# EAGLE board Copy of Motors Control by L293 Driver (done) (1) (EAGLE 9.7.0)

Size 306.62 x 287.84 mm. Coordinates in mm from the lower left corner, seen from the top.
Outline: 0,0 306.62,0 306.62,287.84 0,287.84 0,0
Copper layers (1*16): Top 0.035mm / dielectric 1.5mm / Bottom 0.035mm
Design rules "default": minimum track width 6mil, minimum drill 0.35mm, track to track 6mil, track to pad 6mil, pad to pad 6mil, via to via 6mil, smd to smd 6mil, copper to edge 40mil, drill to drill 6mil, minimum pad ring 10mil, minimum via ring 8mil, stop-mask expansion 4mil, vias tented up to drill 0mil, thermal gap 10mil

## Footprints (pad centres in the part's own frame; a part is rotated, then mirrored left to right if it is on the bottom)
LEDRD254W60D565H860B_G = drill 0.981 pad 1.581: 1 -1.27,0; 2 1.27,0
LEDRD254W60D565H860B_W = drill 0.981 pad 1.581: 1 -1.27,0; 2 1.27,0
MOTOR = drill 1.118 pad 3.15 octagon: + 2.54,0; - -2.54,0
MIC127-140-A01 = smd 0.8 x 2.502: P$1 24.765,2.54; P$2 23.495,2.54; P$3 22.225,2.54; P$4 20.955,2.54; P$5 19.685,2.54; P$6 18.415,2.54; P$7 17.145,2.54; P$8 15.875,2.54; P$9 14.605,2.54; P$10 13.335,2.54; P$11 12.065,2.54; P$12 10.795,2.54; P$13 9.525,2.54; P$14 8.255,2.54; P$15 6.985,2.54; P$16 5.715,2.54; P$17 4.445,2.54; P$18 3.175,2.54; P$19 1.905,2.54; P$20 0.635,2.54; P$21 -0.635,2.54; P$22 -1.905,2.54; P$23 -3.175,2.54; P$24 -4.445,2.54; P$25 -5.715,2.54; P$26 -6.985,2.54; P$27 -8.255,2.54; P$28 -9.525,2.54; P$29 -10.795,2.54; P$30 -12.065,2.54; P$31 -13.335,2.54; P$32 -14.605,2.54; P$33 -15.875,2.54; P$34 -17.145,2.54; P$35 -18.415,2.54; P$36 -19.685,2.54; P$37 -20.955,2.54; P$38 -22.225,2.54; P$39 -23.495,2.54; P$40 -24.765,2.54 | drill 1.1 pad 2.3: P$41 26.899,-1.168; P$42 -26.899,-1.168
PIEZO = drill 1 pad 1.6: 1 -3.5,0; 2 3.5,0
28015 = drill 1.016 long: 1 -2.54,0; 2 0,0; 3 2.54,0
28027 = drill 1.016 long: 1 -2.54,0; 2 0,0; 3 2.54,0
RESAD1016W63L850D250B = drill 0.83 pad 1.43: 1 -5.08,0; 2 5.08,0
SWITCH-MOMENTARY-PTH-6.5MM = drill 1.016 pad 1.88: 1 -3.251,2.261; 2 3.251,2.261; 3 -3.251,-2.261; 4 3.251,-2.261
SWITCH-SPDT-PTH-8.5X3.7MM = drill 1.016 pad 1.88: 1 -2.54,0; 2 0,0; 3 2.54,0
ARDUINO-UNO-R3-SHIELD = drill 1.016 pad 1.88: 3.3V 24.13,-2.54; 5V 24.13,0; A0 24.13,12.7; A1 24.13,15.24; A2 24.13,17.78; A3 24.13,20.32; A4 24.13,22.86; A5 24.13,25.4; AREF -24.13,-13.97; D2 -24.13,20.32; D3 -24.13,17.78; D4 -24.13,15.24; D5 -24.13,12.7; D6 -24.13,10.16; D7 -24.13,7.62; D8 -24.13,3.81; D9 -24.13,1.27; D10 -24.13,-1.27; D11 -24.13,-3.81; D12 -24.13,-6.35; D13 -24.13,-8.89; GND@0 24.13,2.54; GND@1 24.13,5.08; GND@2 -24.13,-11.43; IOREF 24.13,-7.62; NC 24.13,-10.16; RES 24.13,-5.08; RX -24.13,25.4; SCL -24.13,-19.05; SDA -24.13,-16.51; TX -24.13,22.86; VIN 24.13,7.62

## Placement (x,y rotation side)
D1  GREEN  [LEDRD254W60D565H860B_G]  136.16,76.83 180 top
D2  WHITE  [LEDRD254W60D565H860B_W]  143.78,76.83 180 top
M1  MOTOR_HDR  [MOTOR]  195.2,172.54 180 top
M2  MOTOR_HDR  [MOTOR]  159.31,172.1 180 top
M3  MOTOR_HDR  [MOTOR]  197.39,235.34 0 top
M4  MOTOR_HDR  [MOTOR]  159.59,235.34 0 top
MB1  MICRO:BIT_MIC127  [MIC127-140-A01]  31.57,206.5 180 top
MB2  MICRO:BIT_MIC127  [MIC127-140-A01]  275.04,277.05 180 top
PIEZO1  PIEZO  [PIEZO]  268.69,246.82 180 top
PING1  DISTANCE-SENSOR-3PIN  [28015]  247.47,197.24 270 top
PIR1  PIR-SENSOR_28027  [28027]  220.43,274.76 0 top
R1  1k  [RESAD1016W63L850D250B]  149.23,187.03 90 top
R2  1k  [RESAD1016W63L850D250B]  164.47,187.03 90 top
R3  1k  [RESAD1016W63L850D250B]  194.95,187.03 90 top
R4  1k  [RESAD1016W63L850D250B]  210.19,187.03 90 top
R5  220  [RESAD1016W63L850D250B]  134.89,69.22 90 top
R6  220  [RESAD1016W63L850D250B]  142.51,69.22 90 top
S1  SWITCH_MOMENTARY  [SWITCH-MOMENTARY-PTH-6.5MM]  12.12,173.41 90 top
S2  SWITCH_MOMENTARY  [SWITCH-MOMENTARY-PTH-6.5MM]  22.28,173.41 90 top
S3  SWITCH_MOMENTARY  [SWITCH-MOMENTARY-PTH-6.5MM]  32.44,173.41 90 top
S4  TOGGLE  [SWITCH-SPDT-PTH-8.5X3.7MM]  165.37,94.61 0 top
U1  ARDUINO-UNO-R3-SHIELD  [ARDUINO-UNO-R3-SHIELD]  101.74,205.34 180 top
U2  ARDUINO-UNO-R3-SHIELD  [ARDUINO-UNO-R3-SHIELD]  138.7,29.84 270 top

## Library data of the parts
D1 = Tinkercad; CATEGORY: Opto-Electronic; SUB-CATEGORY: LED; VALUE: LED_GREEN
D2 = Tinkercad; CATEGORY: Opto-Electronic; SUB-CATEGORY: LED; VALUE: LED_WHITE
M1-M4 MB1 MB2 PIEZO1 PING1 PIR1 R1-R6 S1-S4 U1 U2 = Tinkercad

## Nets
D1_C: D1.2 R5.2
D2_C: D2.2 R6.2
MB1_GND: MB1.P$35 MB1.P$36 MB1.P$37 MB1.P$38 MB1.P$39 MB1.P$40 S1.3 S2.3 S3.3
MB1_P0: MB1.P$2 MB1.P$3 MB1.P$4 MB1.P$5 S1.2
MB1_P1: MB1.P$10 MB1.P$11 MB1.P$12 MB1.P$13 S2.2
MB1_P2: MB1.P$19 MB1.P$20 MB1.P$21 MB1.P$22 S3.2
MB2_3.3V: MB2.P$27 MB2.P$28 MB2.P$29 MB2.P$30 MB2.P$31 MB2.P$32 PIR1.2
MB2_GND: MB2.P$35 MB2.P$36 MB2.P$37 MB2.P$38 MB2.P$39 MB2.P$40 PIEZO1.2 PIR1.3
MB2_P0: MB2.P$2 MB2.P$3 MB2.P$4 MB2.P$5 PIR1.1
MB2_P2: MB2.P$19 MB2.P$20 MB2.P$21 MB2.P$22 PIEZO1.1
U1_3.3V: PING1.2 U1.3.3V
U1_D7: PING1.3 U1.D7
U1_GND: M1.- M2.- M3.- M4.- PING1.1 R1.1 R2.1 R3.1 R4.1 U1.GND@0 U1.GND@1 U1.GND@2
U2_D4: S4.3 U2.D4
U2_D12: D2.1 U2.D12
U2_D13: D1.1 U2.D13
U2_GND: R5.1 R6.1 S4.2 U2.GND@0 U2.GND@1 U2.GND@2

## Tracks (layer width: path | path; a pad name or v marks a point on that pad's centre or on a via)
D1_C  (1 unrouted)
D2_C  (1 unrouted)
MB1_GND  (8 unrouted)
MB1_P0  (4 unrouted)
MB1_P1  (4 unrouted)
MB1_P2  (4 unrouted)
MB2_3.3V  (6 unrouted)
MB2_GND  (7 unrouted)
MB2_P0  (4 unrouted)
MB2_P2  (4 unrouted)
U1_3.3V  (1 unrouted)
U1_D7  (1 unrouted)
U1_GND  (11 unrouted)
U2_D4  (1 unrouted)
U2_D12  (1 unrouted)
U2_D13  (1 unrouted)
U2_GND  (5 unrouted)